# Altium PCB PCB1.PcbDoc (part 2 of 2)
Units mm, origin at the board's own origin, x right, y up, seen from the top; angles counter-clockwise.
Board outline 45.5 x 25.8 mm, 4 copper layers (Top Copper, Signal Layer 1, Signal Layer 2, Bottom Copper), stack 1.59 mm thick; 62 components, 46 nets, 226 pads, 305 vias.
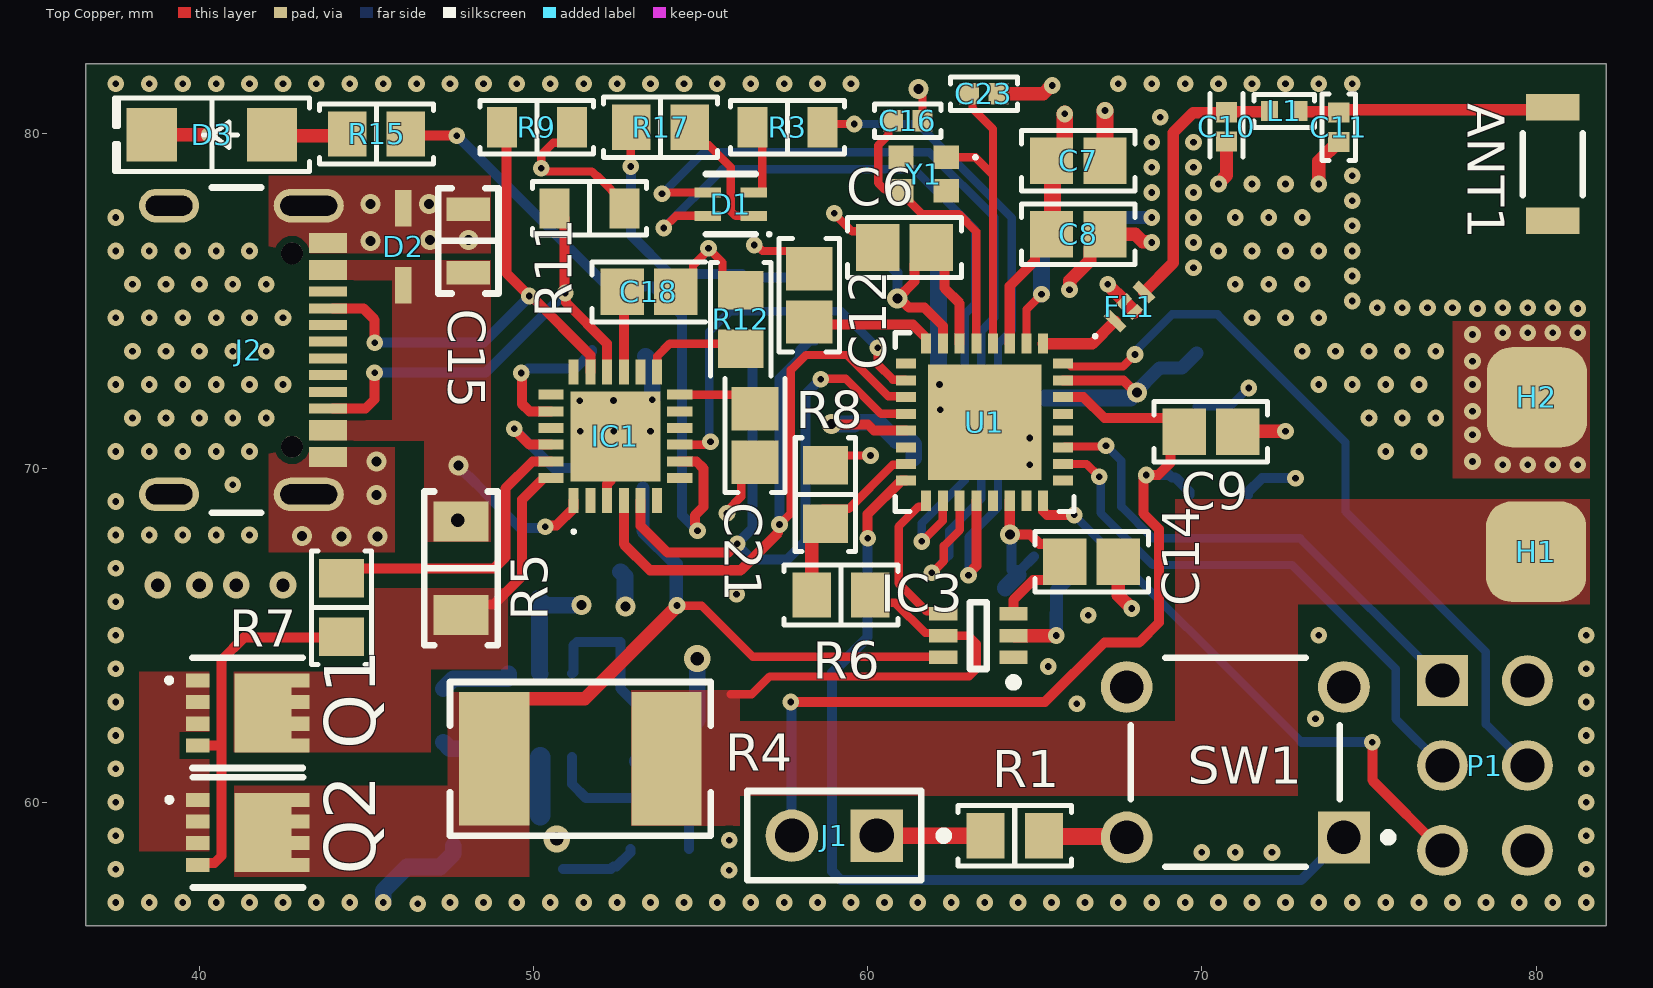
[diagram p0: Top Copper view]

## Via types
v1: diameter 0.5, hole 0.2, Top Copper to Bottom Copper, 280 vias
v2: diameter 0.6, hole 0.3, Top Copper to Bottom Copper, 18 vias
v3: diameter 0.8, hole 0.4, Top Copper to Bottom Copper, 7 vias

## Nets (pads, with @x,y where several pads share a name; then routed paths per layer and width w, separated by ;. In a path a pad name is that pad's centre, name@x,y a point inside that pad or via, vN(x,y) a via of type N, cw(c..) or ccw(c..) an arc to the next point about the centre after c; other vN are vias at no path point) (continued)
+VBUS: (continued)
  Bottom Copper w0.3: v2@47.75,70.047 48.039,69.758 48.058,69.758 48.529,69.287 48.529,69.268 49.593,68.204 49.861,68.204 49.868,68.211 50.311,68.211 v1(50.349,68.25) ; C22.2@50.887,58 52.313,58 52.388,58.075 52.475,58.075 52.9,58.5 R13.1
  Bottom Copper w0.6: 50.2,59.6 IC2.5
  other v2: 47.75,70.075
+VOUT: H1.1 IC3.5 R4.2 R6.2 | length 13
  Top Copper w0.25: 55.904,63.234 56.534,63.234 57.065,63.765 63.037,63.765 63.261,63.989 63.261,64.746 63.018,64.989 IC3.5 62.187,65.064 61.726,65.064 60.82,65.97 60.525,65.97 R6.2@60.075,66.42 ; R6.2@60.083,66.154 60.083,66.157 60.083,66.254 R6.2@60.083,66.174
  Top Copper w0.4: R6.2@60.083,66.157 R6.2@60.458,65.782
ANT: ANT1.1 C11.2 L1.2 | length 7.4
  Top Copper w0.345: L1.2@72.905,80.67 74.07,80.67 C11.2 74.18,80.72 80.12,80.72 ANT1.1@80.2,80.8
B_LED: D1.4 U1.10 | length 23.7
  Top Copper w0.25: v1(53.895,77.183) 54.261,77.55 D1.4 ; v1(61.621,67.807) 61.629,67.807 62.25,68.428 U1.10
  Bottom Copper w0.25: v1(53.895,77.183) 55.651,78.939 61.402,78.939 63.219,77.122 63.219,74.919 62.9,74.6 62.9,69.631 61.621,68.352 v1(61.621,67.807)
BOOT0: C9.2 J1.2 R2.2 U1.22 | length 28.3
  Top Copper w0.3: v1(57.7,63) 65.3,63 67.085,64.785 68.122,64.785 68.717,65.38 68.717,68.173 68.253,68.637 68.253,69.801 68.701,69.801 69.066,70.166 69.066,70.685 C9.2 69.06,71.5 67.082,71.5 66.458,72.124 U1.22
  Bottom Copper w0.3: v1(57.7,63) 57.715,62.985 57.715,59.015 J1.2 ; v1(68.337,69.792) 69.033,69.792 69.1,69.725 69.2,69.725 69.625,69.3 R2.2
CC1: IC1.17 J2.A5 R9.2 | length 15.5
  Top Copper w0.3: J2.A5@43.998,74.781 44.905,74.781 45.247,74.439 v1(45.247,73.755) ; R9.2@49.15,80 49.192,79.958 49.192,75.832 v1(49.873,75.151) ; v1(49.873,75.151) 49.912,75.113 49.968,75.113 51.7,73.381 IC1.17
  Bottom Copper w0.3: v1(45.247,73.755) 48.497,73.755 49.873,75.131 v1(49.873,75.151)
CC2: IC1.16 J2.B5 R11.2 | length 14.4
  Top Copper w0.3: J2.B5@43.998,71.781 44.967,71.781 45.243,72.057 v1(45.243,72.856) ; R11.2 50.92,77.48 50.92,75.275 50.968,75.227 50.968,74.957 52.2,73.725 IC1.16
  Bottom Copper w0.3: v1(45.243,72.856) 48.565,72.856 v1(50.951,75.243)
G_LED: D1.3 U1.11 | length 26.6
  Top Copper w0.25: v1(53.843,78.208) 53.886,78.25 D1.3 ; v1(61.92,66.865) 62.277,67.221 62.277,67.672 62.759,68.154 U1.11@62.759,69.015
  Bottom Copper w0.25: v1(53.843,78.208) 55.086,79.45 61.85,79.45 63.79,77.51 63.79,74.504 63.536,74.251 63.536,74.236 63.4,74.1 63.4,69.087 62.437,68.124 62.437,67.381 v1(61.92,66.865)
GND: C1.1 C2.1 C3.1 C4.1 C5.1 C6.1 C7.1 C8.1 C9.1 C10.1 C11.1 C12.1 C13.2 C14.1 C15.1 C16.1 C17.2 C18.1 C20.1 C21.1 C22.1 C23.1 D2.2 D3.2 FL1.2 FL1.4 H2.1 IC1.3 IC1.25 IC2.2 IC3.2 J2.1 J2.2 J2.3 J2.4 J2.A1-B12 J2.B1-A12 P1.2 R2.1 R8.1 R9.1 R11.1 R12.2 R16.1 SW1.4 U1.33 | length 55.6
  Top Copper w0.25: v1@50.212,78.874 50.264,78.927 50.343,78.927 50.395,78.874 51.743,78.874 51.882,78.735 51.915,78.735 52.725,77.925 R11.1 ; v1(50.228,78.974) 50.228,79.377 50.585,79.734 50.825,79.734 51.15,80.059 R9.1@51.15,80.1 ; C18.1 54.773,75.798 54.773,76.066 55.234,76.526 v1@55.234,76.577 ; v1(55.234,76.581) v1@55.234,76.577 ; v1(55.791,68.652) 55.791,68.72 56.216,69.145 56.216,69.716 C21.1@56.6,70.1 ; R12.2 56.105,75.325 55.655,75.775 55.655,76.155 v1@55.234,76.577 ; v1(56.607,76.675) 56.675,76.675 56.853,76.497 57.725,76.497 C12.1 ; R8.1 59.027,70.379 v1(60.082,70.379) ; v1(58.995,77.626) 59.535,77.086 59.814,77.086 C6.1 ; v2(61.525,81.35) 61.525,81.255 61.64,81.14 C16.1
  Top Copper w0.3: IC1.3 52.2,69.52 52.299,69.619 52.299,69.657 IC1.25@52.245,69.711 ; IC1.25@52.2,69.711 IC1.25@52.245,69.711 ; IC1.25@52.338,69.711 IC1.25@52.245,69.711 ; IC1.25 52.45,69.916 IC1.25@52.245,69.711
  Top Copper w0.4: D3.2 v1(40.3,79.975) ; C23.1 65.248,81.2 65.498,81.45 v1(65.525,81.45) ; IC3.2@64.394,64.989 v1(65.643,64.989) ; v1(66.039,75.339) 66.048,75.348 66.048,75.603 66.65,76.205 66.65,76.55 C8.1 68.004,77 68.235,76.769 68.481,76.769 v1(68.5,76.75) ; v1(67.181,75.498) 67.181,75.491 67.672,75 FL1.4 FL1.2 ; C14.1 67.5,66.2 v1(67.9,65.8) ; v1(70.5,78.5) 70.5,78.527 70.737,78.764 C10.1 ; C9.1@70.7,71.1 v1(72.5,71.1) ; v1(73.5,78.5) 73.5,79.18 74.08,79.76 C11.1
  Top Copper w0.5: C7.1@67.1,78.8 C7.1 v1(67.1,80.7)
  Bottom Copper w0.25: C1.1 70.844,71.844 v1(71.4,72.4)
  Bottom Copper w0.3: R2.1 71.375,69.275 71.8,69.7 v1(72.8,69.7)
  Bottom Copper w0.4: v1(65.643,64.989) 65.643,65.664 65.65,65.671 65.65,66.35 C3.1 ; C3.1@65.9,66.75 C3.1@65.9,66.8 ; v1@66.581,65.619 v1(66.6,65.6) ; C13.2 67.3,77.5 v1(68.5,77.5)
  Bottom Copper w0.5: v1(45.5,57) 45.5,57.35 46.211,58.061 47.2,58.061 47.6,58.461 C22.1 ; C20.1 C20.1@50.175,66.075 ; IC2.2 50.175,63.875 C20.1@50.175,66.075 ; v2(51.44,65.899) 50.351,65.899 C20.1@50.175,66.075 ; R16.1 52.738,66.762 52.738,65.872 v2(52.757,65.853) ; C17.2@53.35,73.35 53.55,73.15 v1(53.55,72.05) ; C2.1@62.118,72.532 C5.1@62.118,75.982
  other v1: 46.533,56.967 37.5,57 38.5,57 39.5,57 40.5,57 41.5,57 42.5,57 43.5,57 44.5,57 47.5,57 48.5,57 49.5,57 50.5,57 51.5,57 52.5,57 53.5,57 54.5,57 55.5,57 56.5,57 57.5,57 58.5,57 59.5,57 60.5,57 61.5,57 62.5,57 63.5,57 64.5,57 65.5,57 66.5,57 67.5,57 68.5,57 69.5,57 70.5,57 71.5,57 72.5,57 73.5,57 74.5,57 75.5,57 76.5,57 77.5,57 78.5,57 79.5,57 80.5,57 81.5,57 55.852,57.966 37.5,58 81.5,58 70,58.5 71,58.5 72.1,58.5 55.859,58.862 37.5,59 81.5,59 37.5,60 81.5,60 37.5,61 81.5,61 37.5,62 81.5,62 73.4,62.5 66.26,62.946 37.5,63 81.5,63 37.5,64 81.5,64 65.404,64.062 37.5,65 73.5,65 81.5,65 37.5,66 56.075,66.224 37.5,67 37.5,68 38.5,68 39.5,68 40.5,68 41.5,68 37.5,69 41,69.5 64.85,70.1 79,70.1 79.75,70.1 80.5,70.1 81.25,70.1 78.1,70.2 37.5,70.5 38.5,70.5 39.5,70.5 40.5,70.5 41.5,70.5 75.5,70.5 76.5,70.5 64.85,70.9 78.1,71 51.4,71.1 52.4,71.1 53.5,71.1 38,71.5 39,71.5 40,71.5 41,71.5 42,71.5 75,71.5 76,71.5 77,71.5 78.1,71.7 62.168,71.746 51.383,72.019 52.395,72.025 37.5,72.5 38.5,72.5 39.5,72.5 40.5,72.5 41.5,72.5 42.5,72.5 62.15,72.5 73.5,72.5 74.5,72.5 75.5,72.5 76.5,72.5 78.1,72.5 78.1,73.2 38,73.5 39,73.5 40,73.5 41,73.5 42,73.5 73,73.5 74,73.5 75,73.5 76,73.5 77,73.5 78.1,74 79,74.05 79.75,74.05 80.5,74.05 81.25,74.05 37.5,74.5 38.5,74.5 39.5,74.5 40.5,74.5 41.5,74.5 42.5,74.5 71.5,74.5 72.5,74.5 73.5,74.5 78.25,74.775 81.25,74.775 75.25,74.8 76,74.8 76.75,74.8 77.5,74.8 79,74.8 79.75,74.8 80.5,74.8 74.5,75 38,75.5 39,75.5 40,75.5 41,75.5 42,75.5 71,75.5 72,75.5 73,75.5 74.5,75.75 69.75,76 37.5,76.5 38.5,76.5 39.5,76.5 40.5,76.5 41.5,76.5 70.5,76.5 71.5,76.5 72.5,76.5 73.5,76.5 74.5,76.5 69.75,76.75 74.5,77.25 37.5,77.5 69.75,77.5 71,77.5 72,77.5 73,77.5 74.5,78 68.5,78.25 69.75,78.25 71.5,78.5 72.5,78.5 74.5,78.75 68.5,79 69.75,79 68.5,79.75 69.75,79.75 68.75,80.5 37.5,81.5 38.5,81.5 39.5,81.5 40.5,81.5 41.5,81.5 42.5,81.5 43.5,81.5 44.5,81.5 45.5,81.5 46.5,81.5 47.5,81.5 48.5,81.5 49.5,81.5 50.5,81.5 51.5,81.5 52.5,81.5 53.5,81.5 54.5,81.5 55.5,81.5 56.5,81.5 57.5,81.5 58.5,81.5 59.5,81.5 67.5,81.5 68.5,81.5 69.5,81.5 70.5,81.5 71.5,81.5 72.5,81.5 73.5,81.5 74.5,81.5
  other v2: 44.25,67.95 45.325,67.95 43.075,67.975 45.3,69.2 45.3,70.2 45.125,76.8 46.9,76.825 48.05,76.825 45.125,77.9 46.875,77.9
I2C_SCL: IC1.5 R19.1 U1.4 | length 20.5
  Top Copper w0.25: v1(58.59,72.658) 58.605,72.673 59.346,72.673 60.396,71.624 U1.4
  Top Copper w0.3: IC1.5 53.2,68.275 54.002,67.473 55.828,67.473 v1@56.09,67.735
  Bottom Copper w0.3: v1(56.098,67.735) 56.098,67.702 56.54,67.26 57.581,67.26 58.143,67.822 58.143,72.211 v1(58.59,72.658) ; v1@56.128,67.705 56.128,67.773 56.547,68.191 56.547,73.403 R19.1
I2C_SDA: IC1.4 R18.1 U1.3 | length 21.9
  Top Copper w0.25: v1(57.359,68.311) 57.701,68.653 57.701,72.94 58.147,73.386 59.38,73.386 60.618,72.149 61.126,72.149 U1.3
  Top Copper w0.3: IC1.4 52.7,67.725 53.481,66.944 56.197,66.944 57.321,68.067 57.321,68.273 v1@57.352,68.304
  Bottom Copper w0.3: v1@57.36,68.312 57.36,72.682 57.973,73.295 57.973,73.526 58.273,73.826 R18.1
I_Sense: IC3.4 U1.9 | length 4.6
  Top Copper w0.25: U1.9 61.75,68.874 61.725,68.849 61.525,68.849 60.925,68.248 60.925,66.555 61.766,65.714 62.187,65.714 IC3.4
INT: IC1.9 U1.2 | length 11.6
  Top Copper w0.25: IC1.9 55.09,70.7 55.127,70.737 55.25,70.737 v1(55.298,70.785) ; v1(60.3,73.6) 60.3,73.1 60.751,72.649 61.125,72.649 U1.2
  Bottom Copper w0.25: v1(55.298,70.785) 55.262,70.821 55.262,74.082 55.872,74.693 59.207,74.693 v1(60.3,73.6)
NetC10_2: C10.2 FL1.3 L1.1 | length 8.1
  Top Copper w0.345: FL1.3 69.141,76.141 69.141,80.041 69.74,80.64 70.5,80.64 70.53,80.67 71.83,80.67 L1.1@71.86,80.7
NetC12_2: C12.2 U1.32 | length 3.9
  Top Copper w0.3: C12.2 58.33,74.291 61.353,74.291 61.75,73.895 U1.32
NetC13_1: C13.1 U1.26 | length 3.9
  Top Copper w0.25: U1.26 64.75,74.75 v1(65.2,75.2)
  Bottom Copper w0.5: v1(65.2,75.2) 65.2,77 C13.1
NetC16_2: C16.2 U1.29 Y1.3 | length 8.9
  Top Copper w0.25: C16.2 60.62,80.26 60.62,79.965 60.52,79.866 60.311,79.656 60.311,78.538 60.51,78.338 60.887,78.338 61.625,77.6 62.725,77.6 63.245,77.08 U1.29@63.245,73.729
NetC17_1: C17.1 IC1.20 | length 4.2
  Top Copper w0.3: v1@49.65,72.7 49.65,71.925 49.875,71.7 IC1.20
  Bottom Copper w0.3: v1(49.636,72.846) 49.69,72.846 49.827,72.983 51.255,72.983 51.755,73.483 C17.1
NetC18_2: C18.2 IC1.15 | length 2.4
  Top Copper w0.3: C18.2@52.6,75.275 52.7,75.175 IC1.15
NetC19_1: C19.1 IC2.1 | length 2.2
  Bottom Copper w0.5: C19.1 47.6,63.7 49.225,63.7 49.25,63.725 IC2.1
NetC19_2: C19.2 IC2.6 L2.1 | length 2.3
  Bottom Copper w0.5: C19.2 47.5,61.6 49.225,61.6 49.25,61.575 IC2.6
NetC21_2: C21.2 IC1.12 | length 2.2
  Top Copper w0.25: IC1.12 56.05,72.2 56.227,72.023 C21.2@56.227,71.703
NetC23_2: C23.2 U1.28 Y1.1 | length 9.4
  Top Copper w0.25: Y1.1 63.225,79.3 63.75,78.775 ; C23.2@63.035,81.18 C23.2 63.135,81.1 63.135,80.765 63.75,80.15 63.75,78.775 ; U1.28 63.75,78.775
NetD1_1: D1.1 R17.1 | length 3.9
  Top Copper w0.25: R17.1@54.575,80.2 54.575,80.11 55.025,79.66 55.249,79.66 55.9,79.009 55.9,77.7 56.05,77.55 D1.1
NetD1_2: D1.2 R3.2 | length 1.8
  Top Copper w0.25: D1.2 56.815,78.25 56.84,78.275 R3.2@56.84,79.79
NetD3_1: D3.1 R15.1 | length 2
  Top Copper w0.4: D3.1 42.2,79.95 R15.1@44.2,79.95
NetIC1_8: IC1.8 R15.2 | length 20.1
  Top Copper w0.3: R15.2@45.95,79.95 v1(47.7,79.95) ; IC1.8 54.875,70.2 55.08,69.996 55.08,68.839 54.824,68.583 54.824,68.341 54.867,68.299 54.867,68.165 v1(54.905,68.127)
  Bottom Copper w0.3: v1(47.7,79.95) 52.211,75.439 53.568,75.439 54.442,74.565 54.442,68.589 v1(54.905,68.127)
NetIC1_13: IC1.13 R12.1 | length 3.2
  Top Copper w0.25: IC1.13 53.707,72.882 53.707,73.357 54.075,73.725 56.05,73.725 R12.1
NetIC1_22: IC1.22 R10.1 | length 3.7
  Top Copper w0.3: v1@49.4,71.175 49.875,70.7 IC1.22
  Bottom Copper w0.3: v1@49.432,71.171 50.603,70 R10.1@51.3,70
  other v1: 49.425,71.175
NetIC1_23: IC1.23 R7.1 | length 8.9
  Top Copper w0.3: R7.1 44.55,67 48.825,67 49.156,67.331 49.156,69.39 49.966,70.2 IC1.23
NetIC1_24: IC1.24 Q1.5 Q1.6 Q1.7 Q1.8 Q1.9 R5.2 | length 5.2
  Top Copper w0.3: R5.2@48.263,65.925 48.82,65.925 49.655,66.761 49.655,69.055 50.3,69.7 IC1.24
NetIC2_3: IC2.3 R14.1 R16.2 | length 4.4
  Bottom Copper w0.3: IC2.3 51.189,63.889 51.189,64.686 51.303,64.8 R16.2 52.6,63.4 53.025,62.975 R14.1
NetIC2_4: IC2.4 R13.2 | length 5.6
  Bottom Copper w0.3: IC2.4 51.15,60.55 51.577,60.123 54.023,60.123 54.6,59.546 54.6,59.525 54.65,59.475 R13.2
NetQ1_1: Q1.1 Q1.2 Q1.3 Q2.1 Q2.2 Q2.3
NetQ1_4: Q1.4 Q2.4 R7.2 | length 11.2
  Top Copper w0.3: Q1.4 40.6,61.7 ; Q2.4 40.01,58.185 40.453,58.185 40.658,58.39 40.658,64.258 41.325,64.925 R7.2@44.225,64.925
NetR1_1: R1.1 SW1.2 | length 2.5
  Top Copper w0.5: R1.1 65.3,58.975 67.725,58.975 SW1.2
NRST: P1.4 U1.24 | length 22.7
  Top Copper w0.25: U1.24 66,73.124 66.083,73.041 67.641,73.041 v1(68,73.4)
  Bottom Copper w0.25: v1(68,73.4) 68,73.468 68.112,73.579 68.112,73.605 69.106,74.6 70.473,74.6 74.3,70.773 74.3,68.7 78.5,64.5 78.5,62.34 P1.4
R_LED: R3.1 U1.12 | length 20.4
  Top Copper w0.25: R3.1 58.75,80.3 v1(59.6,80.3)
  Top Copper w0.3: v1(63.018,66.79) 63.018,66.844 63.25,67.077 U1.12
  Bottom Copper w0.25: v1(59.6,80.3) 61.5,80.3 64.315,77.485 64.315,74.126 63.9,73.711 63.9,68.818 63.018,67.936 v1(63.018,66.79)
RF: FL1.1 U1.25 | length 2.4
  Top Copper w0.345: U1.25 66.724,73.724 FL1.1
SWCLK: P1.3 U1.18 | length 16.6
  Top Copper w0.25: U1.18 66.549,70.124 v1(66.928,69.745)
  Bottom Copper w0.25: v1(66.928,69.745) 66.97,69.703 66.97,68.66 68.53,67.1 72.7,67.1 75.8,64 75.8,62.5 P1.3
SWDIO: P1.1 U1.19 | length 15.1
  Top Copper w0.25: U1.19@65.876,70.624 65.901,70.648 67.108,70.648 v1(67.132,70.672)
  Bottom Copper w0.25: v1(67.132,70.672) 67.589,70.215 67.589,68.847 68.536,67.9 72.94,67.9 P1.1
SWO: P1.5 U1.16 | length 17.1
  Top Copper w0.3: U1.16 65.25,68.714 65.364,68.6 v1(66.178,68.6) ; v1(75.1,61.8) 75.1,60.66 P1.5
  Bottom Copper w0.25: v1(66.178,68.6) 72.978,61.8
  Bottom Copper w0.3: 72.978,61.8 v1(75.1,61.8)
UserButton: SW1.1 U1.8 | length 28.6
  Top Copper w0.3: v1(60,67.9) 60,68.624 61,69.624 U1.8
  Bottom Copper w0.3: v1(60,67.9) 60,64.941 58.935,63.876 58.935,57.933 59.195,57.673 72.973,57.673 SW1.1
V_Sense: R6.1 R8.2 U1.7 | length 5.3
  Top Copper w0.25: R8.2@58.5,68.625 58.659,68.784 59.433,68.784 60.748,70.099 61.125,70.099 U1.7
  Top Copper w0.4: R6.1@58.325,66.5 R8.2@58.325,68.225 ; R6.1@58.333,66.254 R6.1@58.577,66.498
VDrain: IC3.6 Q2.5 Q2.6 Q2.7 Q2.8 Q2.9 R4.1 R10.2 | length 20.4
  Top Copper w0.25: v1(54.29,65.886) 55.03,65.886 56.564,64.353 IC3.6@62.248,64.353
  Top Copper w0.4: R4.1 48.825,62.25 49.675,63.1 51.531,63.1 v1@54.29,65.86
  Bottom Copper w0.4: R10.2@53.275,69.4 53.275,68.117 54.271,67.12 54.271,65.906 v1(54.29,65.886)
pads on no net: ANT1.2 IC1.2 IC1.6 IC1.7 IC1.10 IC1.11 IC1.14 IC1.18 IC1.19 IC1.21 IC3.1 J2. J2.A6 J2.A7 J2.A8 J2.B6 J2.B7 J2.B8 SW1.3 U1.1 U1.6 U1.13 U1.15 U1.17 U1.20 U1.21 Y1.2 Y1.4

## Polygon pours and split planes (outlines as drawn)
+2.9V on Bottom Copper "+2.9V_L04_P001" (solid, pour order 1): 47.9,67 47.9,65.2 46.3,65.2 45.5,64.4 45.5,63.8 38.9,63.8 38.9,67
+VBUS on Bottom Copper "+VBUS_L04_P016" (solid, pour order 16): 49.625,57.763 51.8,57.763 51.8,59.688 49.625,59.688 51.775,59.688 49.625,59.688
NetC19_2 on Bottom Copper "NETC19_2_L04_P002" (solid, pour order 2): 38.952,61.7 45.28,61.8 46.306,62.46 48.008,62.46 48.008,60.5 46.306,60.5 45.1,59.533 38.952,59.533 38.952,61.441
NetQ1_1 on Top Copper "NETQ1_1_L01_P025" (solid, pour order 25): 40.3,62.1 40.3,63.9 38.2,63.9 38.2,58.538 40.3,58.538 40.3,61.3 39.6,61.3 39.6,62.1
GND on Top Copper "GND_L01_P023" (solid, pour order 23): 81.6,74.4 77.5,74.4 77.5,69.7 81.6,69.7
VDrain on Top Copper "VDRAIN_L01_P008" (solid, pour order 8): 41.05,60.5 41.05,57.775 49.875,57.775 49.875,63.3 47.425,63.3 47.425,60.5
+VOUT on Top Copper "+VOUT_L01_P010" (solid, pour order 10): 52.925,62.425 69.2,62.425 69.2,69.075 81.6,69.075 81.6,65.925 72.875,65.925 72.875,60.2 56.2,60.2 56.175,60.2 56.175,59.3 52.925,59.3
GND on Top Copper "GND_L01_P013" (solid, pour order 13): 43.426,76.427 48.725,76.433 48.725,78.753 42.075,78.753 42.075,76.425
+VBUS on Top Copper "+VBUS_L01_P003" (solid, pour order 3): 43.425,76.225 47.225,76.225 48.725,76.225 48.725,70.825 43.425,70.825 43.425,71.425 45.775,71.425 45.775,75.625 43.425,75.625 43.425,76.25
GND on Top Copper "GND_L01_P004" (solid, pour order 4): 43.424,70.632 43.431,70.625 45.85,70.625 45.85,67.475 42.075,67.475 42.075,70.625 42.082,70.632 43.425,70.632
+VOUT on Top Copper "+VOUT_L01_P012" (solid, pour order 12): 56.175,63.35 56.175,62.4 52.925,62.4 52.925,63.35
NetIC1_24 on Top Copper "NETIC1_24_L01_P007" (solid, pour order 7): 41.025,63.9 41.025,61.5 46.925,61.5 46.925,63.975 49.225,63.975 49.225,66.4 45.25,66.4 45.25,63.9
+VBUS on Top Copper "+VBUS_L01_P006" (solid, pour order 6): 48.725,70.825 48.725,67.8 46.725,67.8 46.725,70.825
GND on Signal Layer 2 "GND_L03_P022" (solid, pour order 22): 82.5,82.5 36,82.5 36,56 82.5,56
+2.9V on Signal Layer 2 "+2.9V_L03_P018" (solid, pour order 18): 38.95,67.1 39,67.1 46.475,67.1 48.65,65.025 61.275,65.025 61.275,63.5 46.625,63.5 45.375,64.75 38,64.75 38,67.1
GND on Signal Layer 1 "GND_L02_P000" (solid, pour order 0): 35.75,82.25 82.1,82.25 82.1,56.3 35.75,56.3

## Other copper
Multi-Layer:
  pour cut-out: 75,82.2 75,75.2 82.1,75.2 82.1,82.2

## Silkscreen, mask and mechanical layers (free items; w line width, h text height)
Bottom Overlay:
  drawing of 25 lines, arcs and shapes, not listed
  text "*" at 73.9,79.2 h1.52 r90
  text "SWCLK" at 77.5,78.25 h1.2 r90
  text "SWDIO" at 75,78 h1.2 r90
  text "SWO" at 80,77 h1.2 r90
  text "NRST" at 77.5,71.25 h1.2 r90
  text "+VCC" at 80,71.25 h1.2 r90
  text "GND" at 75,70.75 h1.2 r90